# EAGLE board all_boards_revd_1 (EAGLE 6.1)
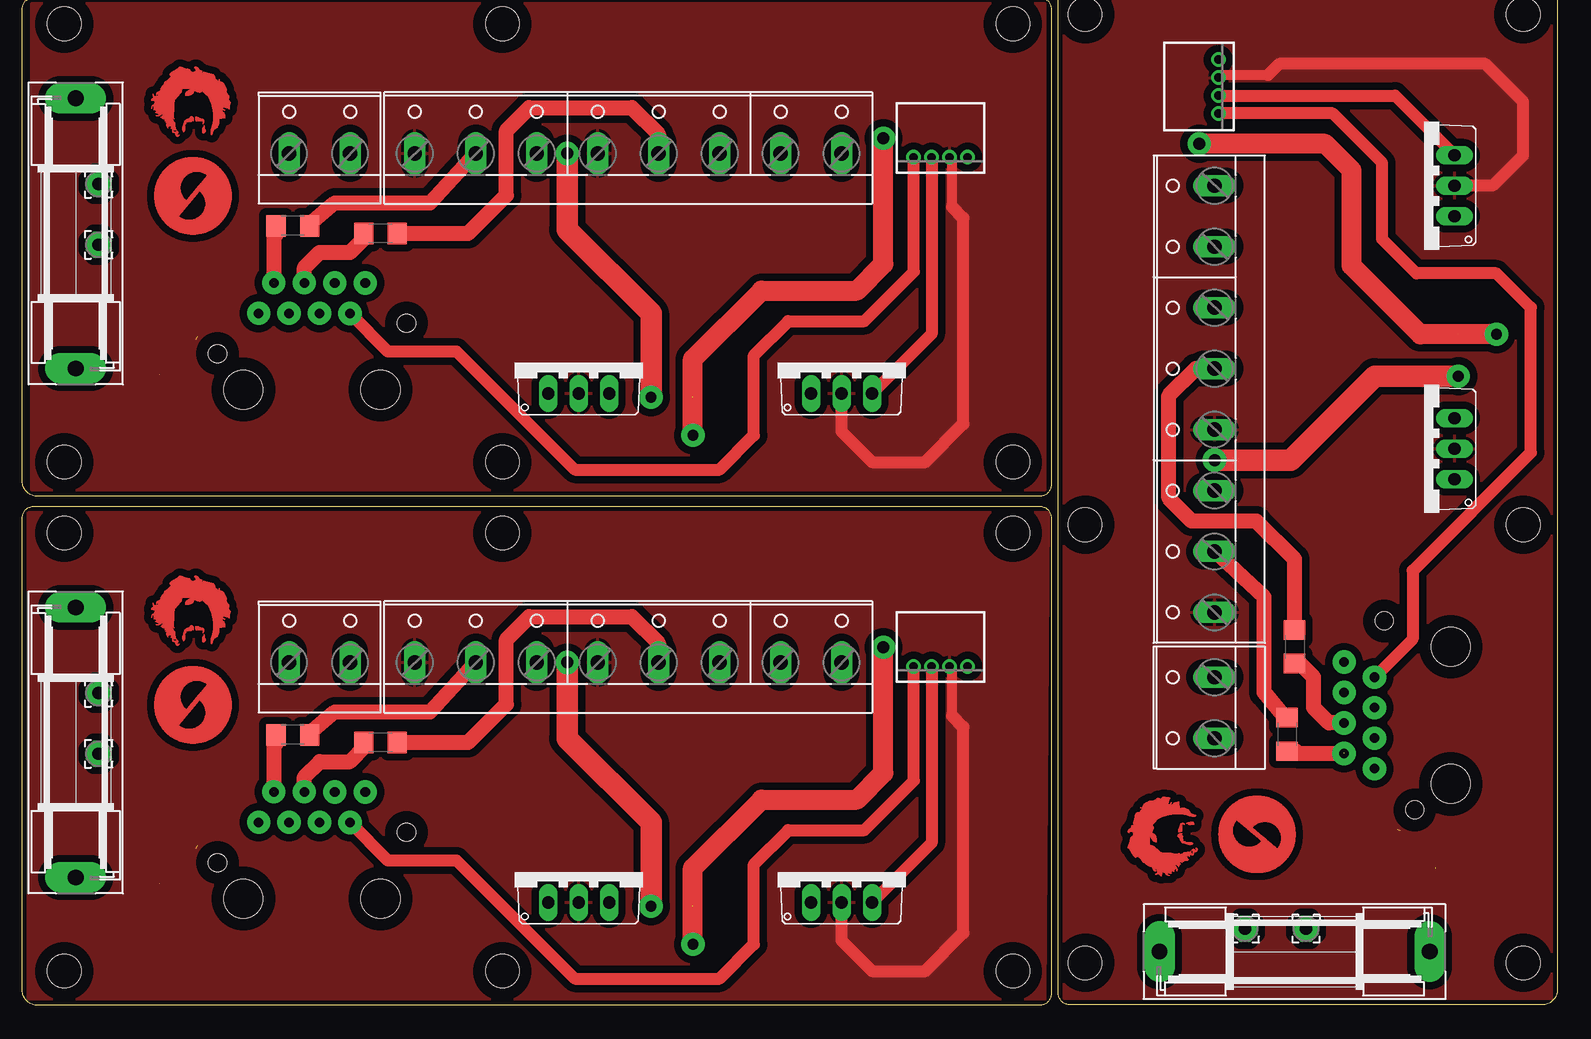
[diagram p0: board, top side]
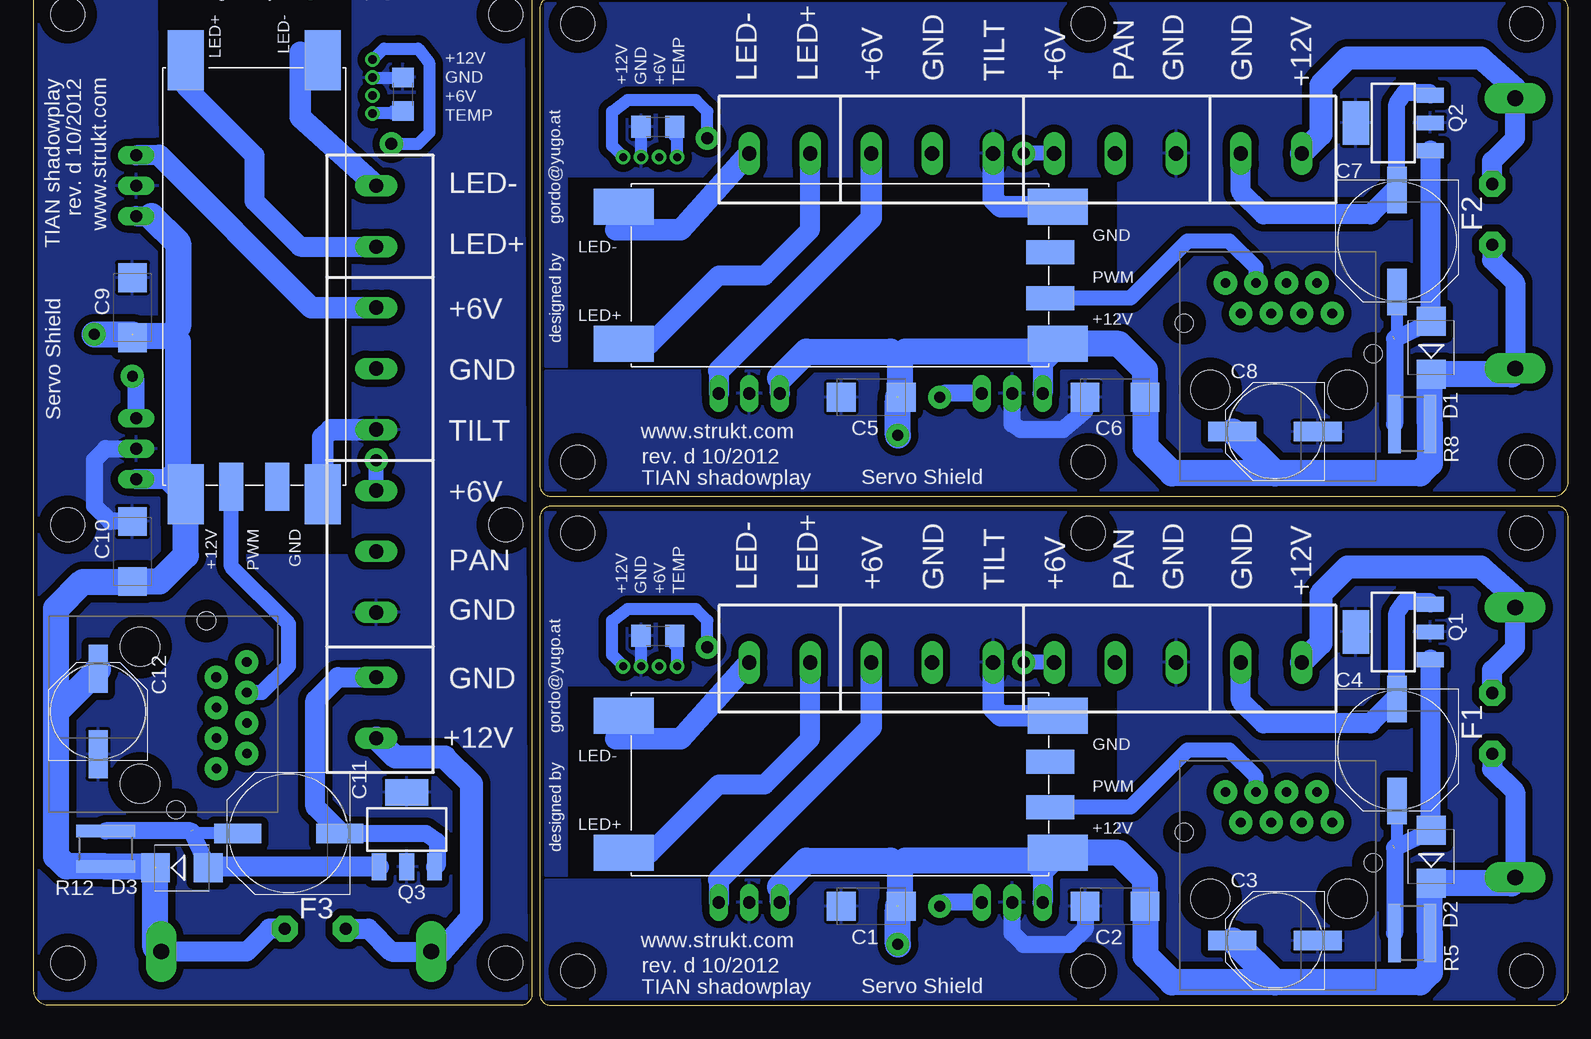
[diagram p1: board, bottom side, seen from below]

No outline drawn. Coordinates in mm, seen from the top.
Copper layers (1*16): Top 0.035mm / dielectric 1.5mm / Bottom 0.035mm
Design rules: minimum track width 10mil, minimum drill 24mil, track to track 8mil, track to pad 8mil, pad to pad 8mil, via to via 8mil, smd to smd 8mil, copper to edge 40mil, drill to drill 8mil, minimum pad ring 10mil, minimum via ring 8mil, stop-mask expansion 4mil, vias tented up to drill 0mil, thermal gap 10mil
Holes 2.8 mm at 40.07,39.65 82.62,3.14 82.62,39.65 3.56,39.65 40.07,3.14 3.56,3.14 40.07,82.07 82.62,45.56 82.62,82.07 3.56,82.07 40.07,45.56 3.56,45.56 88.62,40.33 125.13,82.87 88.62,82.87 88.62,3.81 125.13,40.33 125.13,3.81
Milling: 24 lines

## Footprints (pad centres in the part's own frame; a part is rotated, then mirrored left to right if it is on the bottom)
SMC_C = smd 2.4 x 2.4: + -2.5,0; - 2.5,0
PANASONIC_F = smd 4 x 1.6: + 3.55,0; - -3.55,0
PANASONIC_G = smd 3.9 x 1.6: + 4.25,0; - -4.25,0
SMB = smd 2.4 x 2.4: A 2.2,0; C -2.2,0
SH22,5 = drill 1.321 pad 2.54 long: 1 -11.252,0; 2 11.252,0
TO220V = drill 1.016 long: 1 -2.54,-2.54; 2 0,-2.54; 3 2.54,-2.54
2,15/1,0 = drill 1.016 pad 2.159 octagon: 1 0,0
SOT223 = smd 1.219 x 2.235: 1 -2.311,-3.099; 2 0,-3.099; 3 2.311,-3.099 | smd 3.6 x 2.2: 4 0,3.099
1206 = smd 1.6 x 1.8: 1 -1.4,0; 2 1.4,0
R1218 = smd 1.05 x 4.9: 1 -1.475,0; 2 1.475,0
BUCK_LED_DRIVER = smd 5 x 3: ANODE -0.635,1.905; KATHODE -0.635,13.335; V+ 35.56,1.905; V- 35.56,13.335 | smd 4 x 2: PWM+ 34.925,5.715; PWM- 34.925,9.525
1PORT_ETHERNET = drill 0.8 pad 1.93: P$1 -3.82,3.81; P$2 -6.36,2.54; P$3 -3.82,1.27; P$4 -6.36,0; P$5 -3.82,-1.27; P$6 -6.35,-2.54; P$7 -3.81,-3.81; P$8 -6.35,-5.08 | hole 3.25: 2.54,-6.35; 2.54,5.08 | hole 1.5: -3,-8.51; -0.46,7.24
W237-132 = drill 1.194 long: 1 -2.54,-0.635; 2 2.54,-0.635
W237-8P = drill 1.194 long: 1 -17.78,-0.635; 2 -12.7,-0.635; 3 -7.62,-0.635; 4 -2.54,-0.635; 5 2.54,-0.635; 6 7.62,-0.635; 7 12.7,-0.635; 8 17.78,-0.635
S4B-ZR = drill 0.7 pad 1.1: 1 -2.25,0; 2 -0.75,0; 3 0.75,0; 4 2.25,0

## Placement (x,y rotation side)
C1  1uF  [SMC_C]  58.17,8.54 180 bottom
C2  1uF  [SMC_C]  37.85,8.54 180 bottom
C3  220uF  [PANASONIC_F]  24.51,5.68 180 bottom
C4  10-20uF  [PANASONIC_G]  14.35,21.55 270 bottom
C5  1uF  [SMC_C]  58.17,50.95 180 bottom
C6  1uF  [SMC_C]  37.85,50.95 180 bottom
C7  10-20uF  [PANASONIC_G]  14.35,63.97 270 bottom
C8  220uF  [PANASONIC_F]  24.51,48.1 180 bottom
C9  1uF  [SMC_C]  119.73,58.42 90 bottom
C10  1uF  [SMC_C]  119.73,38.1 90 bottom
C11  10-20uF  [PANASONIC_G]  106.72,14.61 180 bottom
C12  220uF  [PANASONIC_F]  122.59,24.77 90 bottom
D1  ES2D  [SMB]  11.5,55.08 90 bottom
D2  ES2D  [SMB]  11.5,12.66 90 bottom
D3  ES2D  [SMB]  115.61,11.75 0 bottom
F1  [SH22,5]  4.51,22.19 270 top
F2  [SH22,5]  4.51,64.61 270 top
F3  [SH22,5]  106.08,4.77 0 top
IC1  7805TV  [TO220V]  68.33,53.81 0 top
IC2  7805TV  [TO220V]  46.42,53.81 0 top
IC3  7805TV  [TO220V]  68.33,11.39 0 top
IC4  7805TV  [TO220V]  46.42,11.39 0 top
IC5  7805TV  [TO220V]  116.88,68.58 90 top
IC6  7805TV  [TO220V]  116.88,46.68 90 top
PAD1  [2,15/1,0]  6.42,21.24 0 top
PAD2  [2,15/1,0]  6.42,26.32 0 top
PAD3  [2,15/1,0]  6.42,63.65 0 top
PAD4  [2,15/1,0]  6.42,68.73 0 top
PAD5  [2,15/1,0]  107.03,6.67 90 top
PAD6  [2,15/1,0]  101.95,6.67 90 top
Q1  N-HEXFET-2D_SOT232-  [SOT223]  14.67,31.4 90 bottom
Q2  N-HEXFET-2D_SOT232-  [SOT223]  14.67,73.81 90 bottom
Q3  N-HEXFET-2D_SOT232-  [SOT223]  96.87,14.93 0 bottom
R1  10k  [1206]  75.95,31.08 0 bottom
R2  220R  [1206]  29.91,22.19 180 top
R3  220R  [1206]  22.61,22.82 180 top
R4  10k  [1206]  75.95,73.5 0 bottom
R5  470k  [R1218]  13.08,6.31 0 bottom
R6  220R  [1206]  29.91,64.61 180 top
R7  220R  [1206]  22.61,65.24 180 top
R8  470k  [R1218]  13.08,48.73 0 bottom
R9  10k  [1206]  97.19,76.2 270 bottom
R10  220R  [1206]  106.08,30.17 270 top
R11  220R  [1206]  105.45,22.86 270 top
R12  470k  [R1218]  121.96,13.34 270 bottom
U$1  BUCK_LED_DRIVER  [BUCK_LED_DRIVER]  78.17,11.08 0 bottom
U$2  BUCK_LED_DRIVER  [BUCK_LED_DRIVER]  78.17,53.49 0 bottom
U$3  1PORT_ETHERNET  [1PORT_ETHERNET]  23.56,54.13 270 bottom
U$4  BUCK_LED_DRIVER  [BUCK_LED_DRIVER]  117.19,78.43 270 bottom
U$5  1PORT_ETHERNET  [1PORT_ETHERNET]  23.56,11.71 270 bottom
U$6  1PORT_ETHERNET  [1PORT_ETHERNET]  116.56,23.82 180 bottom
X1  [W237-132]  24.83,29.49 0 top
X2  [W237-8P]  50.55,71.91 0 top
X3  [W237-8P]  50.55,29.49 0 top
X4  S4B-ZR  [S4B-ZR]  76.58,28.54 180 top
X5  [W237-132]  24.83,71.91 0 top
X6  S4B-ZR  [S4B-ZR]  76.58,70.96 180 top
X7  [W237-8P]  98.78,50.8 90 top
X8  [W237-132]  98.78,25.09 90 top
X9  S4B-ZR  [S4B-ZR]  99.73,76.84 270 top

## Library data of the parts
C1 C2 C5 C6 C9 C10 = resistor
C3 C4 C7 C8 C11 C12 R5 R8 R12 = rcl
D1-D3 = diode
F1-F3 = fuse; MF: SCHURTER; MPN: 0031.8201; OC_FARNELL: 1162740; OC_NEWARK: 96F8317
IC1-IC6 = linear
PAD1-PAD6 = wirepad
Q1-Q3 = transistor-power
R1-R4 R6 R7 R9-R11 = SparkFun
U$1 U$2 U$4 = tian
U$3 U$5 U$6 = strukt
X1-X3 X5 X7 X8 = con-wago-508; OC_FARNELL: unknown; OC_NEWARK: unknown
X4 X6 X9 = con-jst; MF: FARNELL; MPN: S4B-ZR(LF)(SN); OC_FARNELL: 9491830; OC_NEWARK: 38K8076

## Nets
12V: C1.+ C2.+ C3.+ D2.C F1.2 IC3.1 IC4.1 PAD1.1 R5.2 U$1.V+ X4.1
12V1: C5.+ C6.+ C8.+ D1.C F2.2 IC1.1 IC2.1 PAD3.1 R8.2 U$2.V+ X6.1
12V2: C9.+ C10.+ C12.+ D3.C F3.2 IC5.1 IC6.1 PAD5.1 R12.2 U$4.V+ X9.1
+6V1: IC4.3 X3.3
+6V2: IC3.3 X3.6 X4.3
+6V3: IC1.3 X2.6 X6.3
+6V4: IC2.3 X2.3
+6V5: IC5.3 X7.6 X9.3
+6V6: IC6.3 X7.3
GND: C1.- C2.- C3.- IC3.2 IC4.2 Q1.2 Q1.4 R1.1 U$1.V- X3.1 X3.4 X4.2
GND1: C5.- C6.- C8.- IC1.2 IC2.2 Q2.2 Q2.4 R4.1 U$2.V- X2.1 X2.4 X6.2
GND2: C9.- C10.- C12.- IC5.2 IC6.2 Q3.2 Q3.4 R9.1 U$4.V- X7.1 X7.4 X9.2
GND_INPUT: C4.- Q1.3 X1.2
GND_INPUT1: C7.- Q2.3 X5.2
GND_INPUT2: C11.- Q3.3 X8.2
LED_ANODE: U$1.ANODE X3.7
LED_ANODE1: U$2.ANODE X2.7
LED_ANODE2: U$4.ANODE X7.7
LED_KATHODE: U$1.KATHODE X3.8
LED_KATHODE1: U$2.KATHODE X2.8
LED_KATHODE2: U$4.KATHODE X7.8
N$1: R2.2 U$5.P$4
N$2: R3.2 U$5.P$2
N$3: U$2.PWM-
N$4: C4.+ D2.A Q1.1 R5.1
N$5: U$1.PWM-
N$6: F1.1 PAD2.1 X1.1
N$7: R6.2 U$3.P$4
N$8: R7.2 U$3.P$2
N$9: C7.+ D1.A Q2.1 R8.1
N$10: F2.1 PAD4.1 X5.1
N$11: U$4.PWM-
N$12: R10.2 U$6.P$4
N$13: R11.2 U$6.P$2
N$14: C11.+ D3.A Q3.1 R12.1
N$15: F3.1 PAD6.1 X8.1
PWM: U$1.PWM+ U$5.P$6
PWM1: U$2.PWM+ U$3.P$6
PWM2: U$4.PWM+ U$6.P$6
SIGNAL_PAN: R3.1 X3.2
SIGNAL_PAN1: R7.1 X2.2
SIGNAL_PAN2: R11.1 X7.2
SIGNAL_TILT: R2.1 X3.5
SIGNAL_TILT1: R6.1 X2.5
SIGNAL_TILT2: R10.1 X7.5
TEMP: R1.2 U$5.P$7 X4.4
TEMP1: R4.2 U$3.P$7 X6.4
TEMP2: R9.2 U$6.P$7 X9.4

## Tracks (layer width: path | path; a pad name or v marks a point on that pad's centre or on a via)
12V  (via drill 0.9 pad 1.93, 1 pad 1.93)  (2 unrouted)
  Top 1.676: v55.95,5.36 55.95,11.71 61.66,17.43 69.6,17.43 71.82,19.65 v71.82,30.13
  Bottom 1.016: 55.95,8.58 C1.+ | 35.31,8.5 C2.+ | X4.1 78.83,28.57 79.76,29.49 79.76,32.35 78.49,33.3 72.77,33.3 71.82,32.35 v71.82,30.13
  Bottom 1.422: C3.+ 28.01,5.68
  Bottom 1.676: 43.88,11.71 IC4.1 | IC3.1 65.79,10.12 | PAD1.1 6.42,19.97 4.51,18.06 F1.2
  Bottom 1.778: 56.58,12.35 55.79,11.87
  Bottom 1.93: 11.47,10.44 D2.C
  Bottom 2.184: 65.79,10.12 63.57,12.35 56.58,12.35 | C2.+ 35.35,10.8 37.53,12.98 U$1.V+ 43.88,11.71 44.52,12.35 55.31,12.35 55.79,11.87 55.79,8.69 55.95,8.54 | v55.95,5.36 55.95,8.26 C1.+ | 24.51,2.19 12.45,2.19 11.61,3.03 R5.2 11.61,10.33 11.5,10.44 | 24.51,2.19 28.01,5.68 | 24.51,2.19 33.09,2.19 35.31,4.41 35.31,8.5 | F1.2 4.83,10.44 11.47,10.44
12V1  (via drill 0.9 pad 1.93, 1 pad 1.93)  (2 unrouted)
  Top 1.676: v55.95,47.78 55.95,54.13 61.66,59.84 69.6,59.84 71.82,62.07 v71.82,72.54
  Bottom 1.016: 55.95,50.99 C5.+ | 35.31,50.91 C6.+ | X6.1 78.83,70.98 79.76,71.91 79.76,74.77 78.49,75.72 72.77,75.72 71.82,74.77 v71.82,72.54
  Bottom 1.422: C8.+ 28.01,48.1
  Bottom 1.676: 43.88,54.13 IC2.1 | IC1.1 65.79,52.54 | PAD3.1 6.42,62.38 4.51,60.48 F2.2
  Bottom 1.778: 56.58,54.76 55.79,54.29
  Bottom 1.93: 11.47,52.86 D1.C
  Bottom 2.184: 65.79,52.54 63.57,54.76 56.58,54.76 | C6.+ 35.35,53.22 37.53,55.4 U$2.V+ 43.88,54.13 44.52,54.76 55.31,54.76 55.79,54.29 55.79,51.11 55.95,50.95 | v55.95,47.78 55.95,50.68 C5.+ | 24.51,44.6 12.45,44.6 11.61,45.44 R8.2 11.61,52.75 11.5,52.86 | 24.51,44.6 28.01,48.1 | 24.51,44.6 33.09,44.6 35.31,46.83 35.31,50.91 | F2.2 4.83,52.86 11.47,52.86
12V2  (via drill 0.9 pad 1.93, 1 pad 1.93)  (2 unrouted)
  Top 1.676: v122.91,56.2 116.56,56.2 110.84,61.91 110.84,69.85 108.62,72.08 v98.14,72.08
  Bottom 1.016: 119.69,56.2 C9.+ | 119.77,35.56 C10.+ | X9.1 99.7,79.09 98.78,80.01 95.92,80.01 94.97,78.74 94.97,73.03 95.92,72.08 v98.14,72.08
  Bottom 1.422: C12.+ 122.59,28.26
  Bottom 1.676: 116.56,44.13 IC6.1 | IC5.1 118.15,66.04 | PAD5.1 108.3,6.67 110.21,4.76 F3.2
  Bottom 1.778: 115.92,56.84 116.4,56.04
  Bottom 1.93: 117.83,11.73 D3.C
  Bottom 2.184: 118.15,66.04 115.92,63.82 115.92,56.84 | C10.+ 117.47,35.6 115.29,37.78 U$4.V+ 116.56,44.13 115.92,44.77 115.92,55.56 116.4,56.04 119.58,56.04 119.73,56.2 | v122.91,56.2 120.01,56.2 C9.+ | 126.08,24.77 126.08,12.7 125.24,11.86 R12.2 117.94,11.86 117.83,11.75 | 126.08,24.77 122.59,28.26 | 126.08,24.77 126.08,33.34 123.86,35.56 119.77,35.56 | F3.2 117.83,5.08 117.83,11.73
+6V1  (via drill 0.9 pad 1.93, 1 pad 1.93)
  Top 1.778: v45.47,28.86 45.47,22.51 52.45,15.52 v52.45,8.54
  Bottom 1.27: X3.3 v45.47,28.86
  Bottom 1.422: IC4.3 52.14,8.85 v52.45,8.54
+6V2
  Top 1.016: X4.3 75.83,13.82 IC3.3
  Bottom 1.676: 70.87,10.76 IC3.3
  Bottom 1.778: 70.87,10.76 58.17,23.46 X3.6
+6V3
  Top 1.016: X6.3 75.83,56.24 IC1.3
  Bottom 1.676: 70.87,53.18 IC1.3
  Bottom 1.778: 70.87,53.18 58.17,65.88 X2.6
+6V4  (via drill 0.9 pad 1.93, 1 pad 1.93)
  Top 1.778: v45.47,71.27 45.47,64.92 52.45,57.94 v52.45,50.95
  Bottom 1.27: X2.3 v45.47,71.27
  Bottom 1.422: IC2.3 52.14,51.27 v52.45,50.95
+6V5
  Top 1.016: X9.3 114.45,76.09 IC5.3
  Bottom 1.676: 117.51,71.12 IC5.3
  Bottom 1.778: 117.51,71.12 104.81,58.42 X7.6
+6V6  (via drill 0.9 pad 1.93, 1 pad 1.93)
  Top 1.778: v99.41,45.72 105.76,45.72 112.75,52.71 v119.73,52.71
  Bottom 1.27: X7.3 v99.41,45.72
  Bottom 1.422: IC6.3 119.42,52.39 v119.73,52.71
GND
  Top 0.813: 77.54,24.41 77.54,28.34 X4.2
  Top 1.016: 77.54,24.41 78.49,23.46 78.49,6.31 75.31,3.14 70.87,3.14 68.33,5.68 IC3.2
  Bottom 1.016: X4.2 77.33,30.33 77.22,31.08 77.54,31.08
  Bottom 1.422: C2.- 40.35,6.67 41.66,5.36 45.47,5.36 46.42,6.31 IC4.2
  Bottom 1.778: U$1.V- 47.37,24.41 48.01,25.05 X3.4
  pour Bottom (isolate 0.61): 0.57,0.79 85.28,0.79 85.28,10.76 37.53,10.76 37.53,26.95 83.57,26.95 83.57,11.08 85.28,11.08 85.28,41.37 0.57,41.37
  pour Top (isolate 0.61): 0.57,41.37 85.54,41.37 85.28,0.79 0.57,0.79
GND1
  Top 0.813: 77.54,66.83 77.54,70.75 X6.2
  Top 1.016: 77.54,66.83 78.49,65.88 78.49,48.73 75.31,45.56 70.87,45.56 68.33,48.1 IC1.2
  Bottom 1.016: X6.2 77.33,72.75 77.22,73.5 77.54,73.5
  Bottom 1.422: C6.- 40.35,49.85 42.17,48.29 45.72,48.29 46.42,48.73 IC2.2
  Bottom 1.778: U$2.V- 47.37,66.83 48.01,67.46 X2.4
  pour Bottom (isolate 0.61): 0.83,43.21 85.28,43.21 85.28,53.18 37.53,53.18 37.53,69.37 83.57,69.37 83.57,53.49 85.28,53.49 85.28,83.78 0.83,83.78
  pour Top (isolate 0.61): 0.83,83.78 85.28,83.78 85.28,43.21 0.83,43.21
GND2
  Top 0.813: 103.86,77.79 99.93,77.79 X9.2
  Top 1.016: 103.86,77.79 104.81,78.74 121.96,78.74 125.13,75.57 125.13,71.12 122.59,68.58 IC5.2
  Bottom 1.016: X9.2 97.94,77.59 97.19,77.47 97.19,77.79
  Bottom 1.422: C10.- 121.6,40.6 122.91,41.91 122.91,45.72 121.96,46.67 IC6.2
  Bottom 1.778: U$4.V- 103.86,47.63 103.22,48.26 X7.4
  pour Bottom (isolate 0.61): 127.48,0.83 127.48,85.54 117.77,85.54 117.51,37.79 101.32,37.79 101.32,85.35 117.19,85.35 117.45,85.54 87.16,85.54 86.9,0.83
  pour Top (isolate 0.61): 86.9,0.83 86.9,85.54 127.48,85.54 127.48,0.83
GND_INPUT
  Bottom 1.422: C4.- 14.35,32.98 13.72,33.94 11.66,33.94 Q1.3
  Bottom 1.676: C4.- 14.35,26 16.58,23.78 25.47,23.78 27.37,25.68 X1.2
GND_INPUT1
  Bottom 1.422: C7.- 14.35,75.4 13.72,76.35 11.66,76.35 Q2.3
  Bottom 1.676: C7.- 14.35,68.42 16.58,66.19 25.47,66.19 27.37,68.1 X5.2
GND_INPUT2
  Bottom 1.422: C11.- 95.29,14.61 94.33,13.97 94.33,11.91 Q3.3
  Bottom 1.676: C11.- 102.27,14.61 104.49,16.83 104.49,25.72 102.59,27.62 X8.2
LED_ANODE
  Bottom 1.016: X3.7 63.25,27.59
  Bottom 1.676: U$1.ANODE 76.58,12.98 70.87,18.7 67.06,18.7 63.25,22.51 X3.7
LED_ANODE1
  Bottom 1.016: X2.7 63.25,70
  Bottom 1.676: U$2.ANODE 76.58,55.4 70.87,61.11 67.06,61.11 63.25,64.92 X2.7
LED_ANODE2
  Bottom 1.016: X7.7 100.68,63.5
  Bottom 1.676: U$4.ANODE 115.29,76.84 109.57,71.12 109.57,67.31 105.76,63.5 X7.7
LED_KATHODE
  Bottom 1.778: U$1.KATHODE 79.44,22.51 74.04,22.51 X3.8
LED_KATHODE1
  Bottom 1.778: U$2.KATHODE 79.44,64.92 74.04,64.92 X2.8
LED_KATHODE2
  Bottom 1.778: U$4.KATHODE 105.76,79.69 105.76,74.3 X7.8
N$1
  Top 1.016: R2.2 28.51,22 28.64,21.87
  Top 1.27: U$5.P$4 23.56,19.33 24.83,20.6 27.37,20.6 28.64,21.87
N$2  (1 unrouted)
  Top 1.27: R3.2 21.21,22.06 21.02,21.87 U$5.P$2
N$4  (1 unrouted)
  Bottom 1.016: C4.+ 14.35,13.93 14.67,13.62
  Bottom 1.422: D2.A 14.56,13.39 R5.1
  Bottom 1.676: Q1.1 11.57,15.57 D2.A
N$6
  Bottom 1.676: PAD2.1 6.42,28.22 4.51,30.13 F1.1
  Bottom 1.93: F1.1 4.51,34.25 7.37,36.79 18.48,36.79 20.7,34.57 20.7,30.44 X1.1
N$7
  Top 1.016: R6.2 28.51,64.42 28.64,64.29
  Top 1.27: U$3.P$4 23.56,61.75 24.83,63.02 27.37,63.02 28.64,64.29
N$8  (1 unrouted)
  Top 1.27: R7.2 21.21,64.48 21.02,64.29 21.02,60.48
N$9  (1 unrouted)
  Bottom 1.016: C7.+ 14.35,56.35 14.67,56.03
  Bottom 1.422: D1.A 14.56,55.81 R8.1
  Bottom 1.676: Q2.1 11.57,57.99 D1.A
N$10
  Bottom 1.676: PAD4.1 6.42,70.64 4.51,72.54 F2.1
  Bottom 1.93: F2.1 4.51,76.67 7.37,79.21 18.48,79.21 20.7,76.99 20.7,72.86 X5.1
N$12
  Top 1.016: R10.2 106.27,28.77 106.4,28.89
  Top 1.27: U$6.P$4 108.94,23.82 107.67,25.09 107.67,27.62 106.4,28.89
N$13  (1 unrouted)
  Top 1.27: R11.2 106.21,21.46 106.4,21.27 U$6.P$2
N$14  (1 unrouted)
  Bottom 1.016: C11.+ 114.34,14.61 114.65,14.93
  Bottom 1.422: D3.A 114.88,14.81 R12.1
  Bottom 1.676: Q3.1 112.7,11.83 D3.A
N$15
  Bottom 1.676: PAD6.1 100.05,6.67 98.14,4.76 F3.1
  Bottom 1.93: F3.1 94.02,4.76 91.48,7.62 91.48,18.73 93.7,20.96 97.83,20.96 X8.1
PWM
  Bottom 1.27: U$5.P$6 26.1,19.33 28.32,21.55 31.82,21.55 36.58,16.79 U$1.PWM+
PWM1
  Bottom 1.27: U$3.P$6 26.1,61.75 28.32,63.97 31.82,63.97 36.58,59.21 U$2.PWM+
PWM2
  Bottom 1.27: U$6.P$6 108.94,26.36 106.72,28.58 106.72,32.07 111.48,36.83 U$4.PWM+
SIGNAL_PAN
  Top 1.27: R3.1 24.01,22.95 26.1,24.73 34.04,24.73 X3.2
SIGNAL_PAN1
  Top 1.27: R7.1 24.01,65.37 26.1,67.15 34.04,67.15 X2.2
SIGNAL_PAN2
  Top 1.27: R11.1 105.32,24.26 103.54,26.36 103.54,34.29 X7.2
SIGNAL_TILT
  Top 1.27: R2.1 37.21,22.19 40.39,25.36 40.39,30.76 42.29,32.67 50.87,32.67 53.09,30.44 X3.5
SIGNAL_TILT1
  Top 1.27: R6.1 37.21,64.61 40.39,67.78 40.39,73.18 42.29,75.08 50.87,75.08 53.09,72.86 X2.5
SIGNAL_TILT2
  Top 1.27: R10.1 106.08,37.47 102.91,40.64 97.51,40.64 95.6,42.55 95.6,51.12 97.83,53.34 X7.5
TEMP
  Top 1.016: X4.4 74.36,28.51 74.36,19.01 70.23,14.89 63.88,14.89 61.03,12.03 61.03,5.36 58.17,2.5 46.1,2.5 36.26,12.35 30.55,12.35 U$5.P$7
  Bottom 1.016: R1.2 74.55,30.31 74.36,30.13 74.36,28.57 X4.4
TEMP1
  Top 1.016: X6.4 74.36,70.93 74.36,61.43 70.23,57.3 63.88,57.3 61.03,54.45 61.03,47.78 58.17,44.92 46.1,44.92 36.26,54.76 30.55,54.76 U$3.P$7
  Bottom 1.016: R4.2 74.55,72.73 74.36,72.54 74.36,70.98 X6.4
TEMP2
  Top 1.016: X9.4 99.76,74.61 109.26,74.61 113.38,70.49 113.38,64.14 116.24,61.28 122.91,61.28 125.77,58.42 125.77,46.36 115.92,36.52 115.92,30.8 U$6.P$7
  Bottom 1.016: R9.2 97.96,74.8 98.14,74.61 99.7,74.61 X9.4
(copper drawn outside any net)
  shapes: Top area x6108

## Text on the board
bPlace: gordo@yugo.at | designed by | +12V | LED- | LED+ | +12V | www.strukt.com | rev. d 10/2012 | TIAN shadowplay | GND | GND | PAN | +6V | TILT | GND | +6V | LED+ | LED- | TEMP | +6V | GND | +12V | GND | +6V | gordo@yugo.at | TEMP | LED- | GND | LED- | designed by | LED+ | PWM | Servo Shield | +12V | LED+ | +6V | GND | www.strukt.com | TILT | rev. d 10/2012 | Servo Shield | TIAN shadowplay | +6V | +12V | GND | PWM | +12V | PAN | GND | GND | PAN | +6V | TILT | GND | +6V | LED+ | LED- | TEMP | +6V | GND | +12V | gordo@yugo.at | GND | GND | +12V | GND | LED- | designed by | PWM | +12V | LED+ | www.strukt.com | rev. d 10/2012 | Servo Shield | TIAN shadowplay